# Altium PCB TM7705dayin.PcbDoc (part 1 of 2)
Units mm, origin at the board's own origin, x right, y up, seen from the top; angles counter-clockwise.
Board outline 80.01 x 33.4 mm, 2 copper layers (Top Layer, Bottom Layer); 118 components, 26 nets, 462 pads, 0 vias.
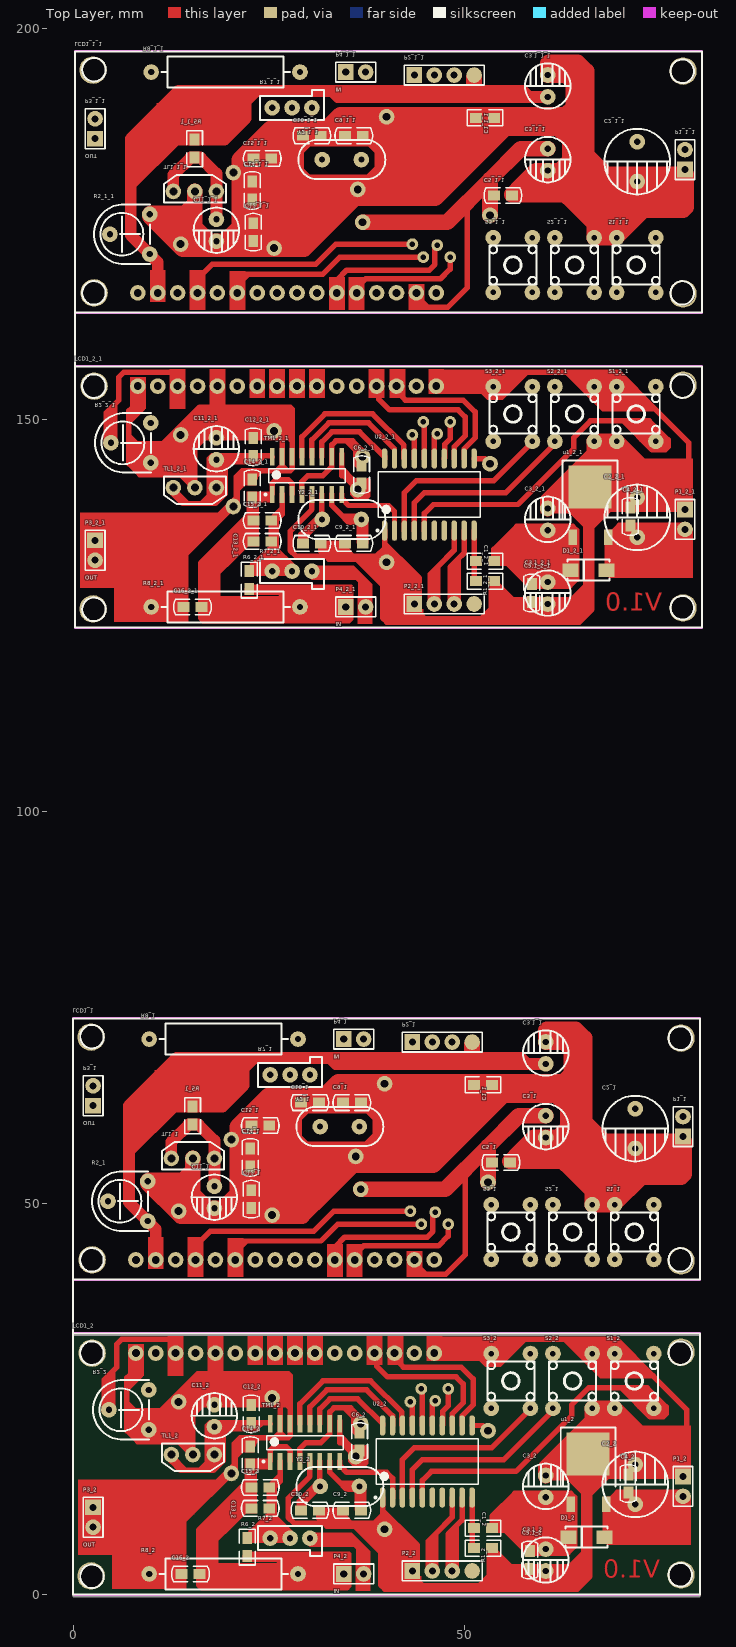
[diagram p0: Top Layer view]
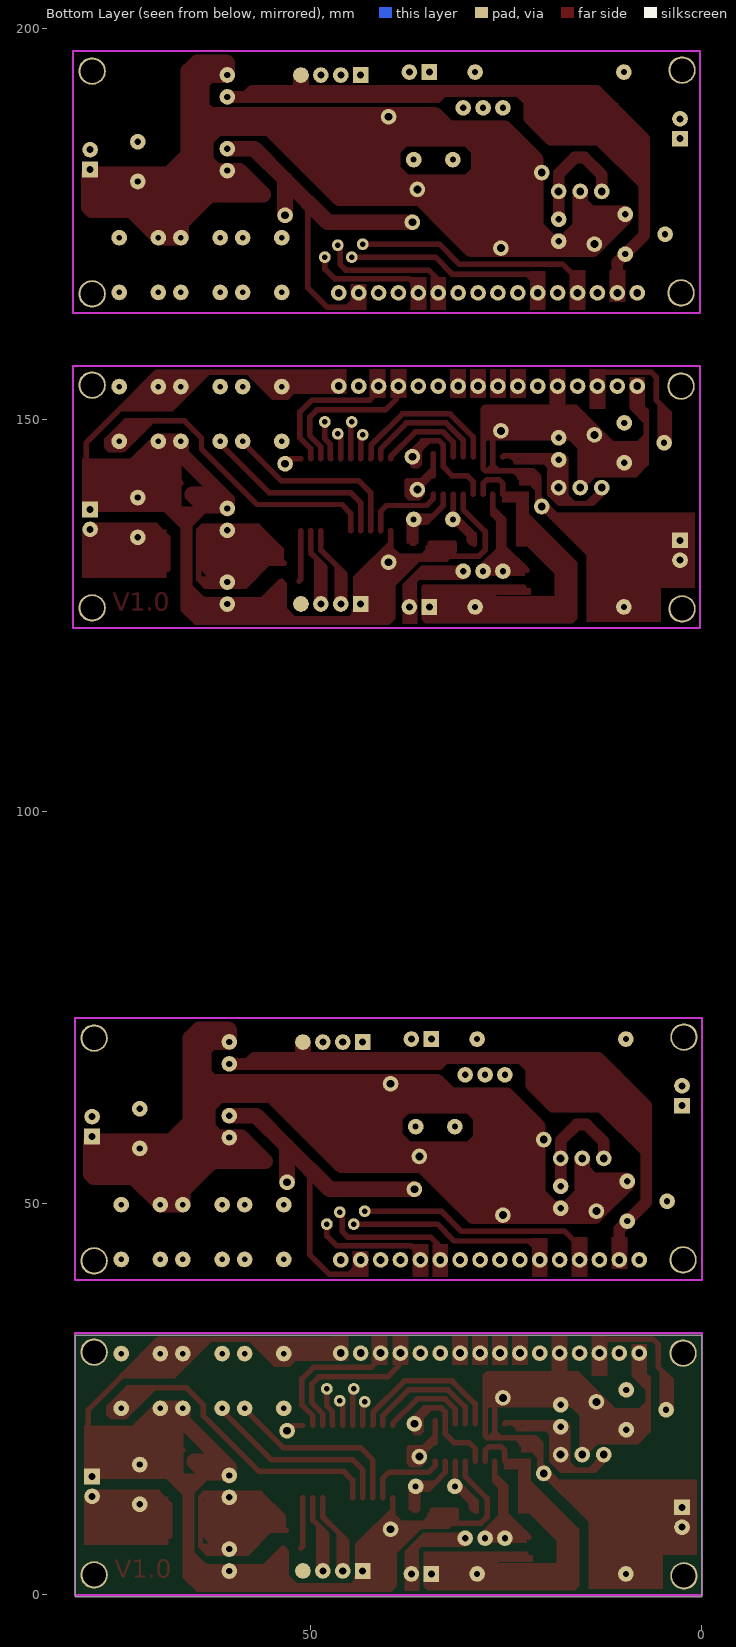
[diagram p1: Bottom Layer view, seen from below]

## Layer stack, top to bottom
Top Solder: solder mask 0.0102, Solder Resist, Dk 3.5
Top Layer: signal copper 0.0356
Dielectric 1: dielectric 0.32, FR-4, Dk 4.8
Bottom Layer: signal copper 0.0356
Bottom Solder: solder mask 0.0102, Solder Resist, Dk 3.5

## Board outline
0,-0.254 80.01,-0.254 80.01,33.147 0,33.147

## Design rules (kind name [scope] priority, off if disabled: settings)
Clearance [All] p1: gap=0.254
PolygonConnect [All] p1: connectstyle=Relief reliefconductorwidth=0.254 reliefentries=4 polygonreliefangle="90 Angle" airgapwidth=0.254
RoutingVias [All] p1: holewidth=0.711 width=1.27 viastyle="Through Hole" minholewidth=0.711 minwidth=1.27 maxholewidth=0.711 maxwidth=1.27
SolderMaskExpansion [All] p1: expansion=0.102
Width [All] p1: maxlimit=3 minlimit=0.4 preferedwidth=0.5 toplayer_minwidth=0.5 minimp=50.000000 maximp=50.000000 favimp=50.000000
30 further rules are at their usual default settings.

## Classes and differential pairs
component class TM7705: TL1

## Components (designator, comment, footprint, x,y, rotation, side; value= is the part's Value field where it differs from the comment)
C1_1 "10uF" 0805 51.181,65.111 r0 top (schematic designator C1)
C1_1_1 "10uF" 0805 51.435,188.555 r0 top (schematic designator C1)
C1_2 "10uF" 0805 51.181,8.509 r0 top (schematic designator C1)
C1_2_1 "10uF" 0805 51.435,131.953 r0 top (schematic designator C1)
C2_1 "100uF" DR3 71.755,62.063 r270 top (schematic designator C2)
C2_1_1 "100uF" DR3 72.009,185.507 r270 top (schematic designator C2)
C2_2 "100uF" DR3 71.755,11.557 r90 top (schematic designator C2)
C2_2_1 "100uF" DR3 72.009,135.001 r90 top (schematic designator C2)
C3.1_1 "100uF" DR 60.325,67.778 r90 top (schematic designator C3.1)
C3.1_1_1 "100uF" DR 60.579,191.222 r90 top (schematic designator C3.1)
C3.1_2 "100uF" DR 60.325,5.842 r270 top (schematic designator C3.1)
C3.1_2_1 "100uF" DR 60.579,129.286 r270 top (schematic designator C3.1)
C3_1 "100uF" DR 60.325,61.174 r270 top (schematic designator C3)
C3_1_1 "100uF" DR 60.579,184.618 r270 top (schematic designator C3)
C3_2 "100uF" DR 60.325,12.446 r90 top (schematic designator C3)
C3_2_1 "100uF" DR 60.579,135.89 r90 top (schematic designator C3)
C4_2 "104" 0805C 70.866,15.367 r270 top (schematic designator C4)
C4_2_1 "104" 0805C 71.12,138.811 r270 top (schematic designator C4)
C5.1_2 "104" 0805C 58.293,3.302 r90 top (schematic designator C5.1)
C5.1_2_1 "104" 0805C 58.547,126.746 r90 top (schematic designator C5.1)
C5_1 "104" 0805C 55.753,55.205 r180 top (schematic designator C5)
C5_1_1 "104" 0805C 56.007,178.649 r180 top (schematic designator C5)
C6_2 "226" 0805C 36.576,18.415 r90 top (schematic designator C6)
C6_2_1 "226" 0805C 36.83,141.859 r90 top (schematic designator C6)
C9_1 "30p" 0805C 36.717,62.825 r180 top (schematic designator C9)
C9_1_1 "30p" 0805C 36.971,186.269 r180 top (schematic designator C9)
C9_2 "30p" 0805C 36.717,10.795 r180 top (schematic designator C9)
C9_2_1 "30p" 0805C 36.971,134.239 r180 top (schematic designator C9)
C10_1 "30p" 0805C 29.069,62.825 r0 top (schematic designator C10)
C10_1_1 "30p" 0805C 29.323,186.269 r0 top (schematic designator C10)
C10_2 "30p" 0805C 29.069,10.795 r0 top (schematic designator C10)
C10_2_1 "30p" 0805C 29.323,134.239 r0 top (schematic designator C10)
C11_1 "47U" DR 18.034,52.157 r270 top (schematic designator C11)
C11_1_1 "47U" DR 18.288,175.601 r270 top (schematic designator C11)
C11_2 "47U" DR 18.034,21.463 r90 top (schematic designator C11)
C11_2_1 "47U" DR 18.288,144.907 r90 top (schematic designator C11)
C12_1 "104" 0805C 22.733,49.363 r90 top (schematic designator C12)
C12_1_1 "104" 0805C 22.987,172.807 r90 top (schematic designator C12)
C12_2 "104" 0805C 22.733,24.257 r270 top (schematic designator C12)
C12_2_1 "104" 0805C 22.987,147.701 r270 top (schematic designator C12)
C13_2 "226" 0805C 25.033,11.049 r180 top (schematic designator C13)
C13_2_1 "226" 0805C 25.287,134.493 r180 top (schematic designator C13)
C14_1 "103" 0805C 22.606,54.697 r90 top (schematic designator C14)
C14_1_1 "103" 0805C 22.86,178.141 r90 top (schematic designator C14)
C14_2 "103" 0805C 22.606,18.923 r270 top (schematic designator C14)
C14_2_1 "103" 0805C 22.86,142.367 r270 top (schematic designator C14)
C15_1 "103" 0805C 25.033,59.904 r180 top (schematic designator C15)
C15_1_1 "103" 0805C 25.287,183.348 r180 top (schematic designator C15)
C15_2 "103" 0805C 25.033,13.716 r180 top (schematic designator C15)
C15_2_1 "103" 0805C 25.287,137.16 r180 top (schematic designator C15)
C16_2 "226" 0805C 13.829,2.667 r0 top (schematic designator C16)
C16_2_1 "226" 0805C 14.083,126.111 r0 top (schematic designator C16)
D1_2 "Diode" DO-214AC 65.532,7.366 r180 top (schematic designator D1)
D1_2_1 "Diode" DO-214AC 65.786,130.81 r180 top (schematic designator D1)
LCD1_1 "LCD1602" LCD1602 8.001,42.759 r0 top (schematic designator LCD1)
LCD1_1_1 "LCD1602" LCD1602 8.255,166.203 r0 top (schematic designator LCD1)
LCD1_2 "LCD1602" LCD1602 8.001,30.861 r0 top (schematic designator LCD1)
LCD1_2_1 "LCD1602" LCD1602 8.255,154.305 r0 top (schematic designator LCD1)
P1_1 "Header 2" HDR1X2 77.851,58.507 r90 top (schematic designator P1)
P1_1_1 "Header 2" HDR1X2 78.105,181.951 r90 top (schematic designator P1)
P1_2 "Header 2" HDR1X2 77.851,15.113 r270 top (schematic designator P1)
P1_2_1 "Header 2" HDR1X2 78.105,138.557 r270 top (schematic designator P1)
P2_1 "comm" HDR1X4 43.307,70.572 r0 top (schematic designator P2)
P2_1_1 "comm" HDR1X4 43.561,194.016 r0 top (schematic designator P2)
P2_2 "comm" HDR1X4 43.307,3.048 r0 top (schematic designator P2)
P2_2_1 "comm" HDR1X4 43.561,126.492 r0 top (schematic designator P2)
P3_1 "OUT" HDR1X2 2.54,62.444 r90 top (schematic designator P3)
P3_1_1 "OUT" HDR1X2 2.794,185.888 r90 top (schematic designator P3)
P3_2 "OUT" HDR1X2 2.54,11.176 r270 top (schematic designator P3)
P3_2_1 "OUT" HDR1X2 2.794,134.62 r270 top (schematic designator P3)
P4_1 "IN" HDR1X2 34.544,70.953 r0 top (schematic designator P4)
P4_1_1 "IN" HDR1X2 34.798,194.397 r0 top (schematic designator P4)
P4_2 "IN" HDR1X2 34.544,2.667 r0 top (schematic designator P4)
P4_2_1 "IN" HDR1X2 34.798,126.111 r0 top (schematic designator P4)
R1_2 "10K" 0805R 53.467,5.969 r180 top (schematic designator R1)
R1_2_1 "10K" 0805R 53.721,129.413 r180 top (schematic designator R1)
R2_1 "10k" DWQ#1 9.525,47.712 r180 top (schematic designator R2)
R2_1_1 "10k" DWQ#1 9.779,171.156 r180 top (schematic designator R2)
R2_2 "10k" DWQ#2 9.652,26.162 r180 top (schematic designator R2)
R2_2_1 "10k" DWQ#2 9.906,149.606 r180 top (schematic designator R2)
R5_1 "1K" 0805R 15.24,60.031 r90 top (schematic designator R5)
R5_1_1 "1K" 0805R 15.494,183.475 r90 top (schematic designator R5)
R6_2 "5K" 0805R 22.225,4.953 r90 top (schematic designator R6)
R6_2_1 "5K" 0805R 22.479,128.397 r90 top (schematic designator R6)
R7_1 "100k" DWQ1 30.226,66.381 r180 top (schematic designator R7)
R7_1_1 "100k" DWQ1 30.48,189.825 r180 top (schematic designator R7)
R7_2 "100k" DWQ1 30.226,7.239 r180 top (schematic designator R7)
R7_2_1 "100k" DWQ1 30.48,130.683 r180 top (schematic designator R7)
R8_1 "0.01" DZ-1W 28.702,70.953 r180 top (schematic designator R8)
R8_1_1 "0.01" DZ-1W 28.956,194.397 r180 top (schematic designator R8)
R8_2 "0.01" DZ-1W 28.702,2.667 r180 top (schematic designator R8)
R8_2_1 "0.01" DZ-1W 28.956,126.111 r180 top (schematic designator R8)
S1_1 "SW-PB" SW 71.628,46.315 r0 top (schematic designator S1)
S1_1_1 "SW-PB" SW 71.882,169.759 r0 top (schematic designator S1)
S1_2 "SW-PB" SW 71.628,27.305 r0 top (schematic designator S1)
S1_2_1 "SW-PB" SW 71.882,150.749 r0 top (schematic designator S1)
S2_1 "SW-PB" SW 63.754,46.315 r180 top (schematic designator S2)
S2_1_1 "SW-PB" SW 64.008,169.759 r180 top (schematic designator S2)
S2_2 "SW-PB" SW 63.754,27.305 r180 top (schematic designator S2)
S2_2_1 "SW-PB" SW 64.008,150.749 r180 top (schematic designator S2)
S3_1 "SW-PB" SW 55.88,46.315 r0 top (schematic designator S3)
S3_1_1 "SW-PB" SW 56.134,169.759 r0 top (schematic designator S3)
S3_2 "SW-PB" SW 55.88,27.305 r0 top (schematic designator S3)
S3_2_1 "SW-PB" SW 56.134,150.749 r0 top (schematic designator S3)
TL1_1 "TL431" TL431 18.034,55.713 r180 top (schematic designator TL1)
TL1_1_1 "TL431" TL431 18.288,179.157 r180 top (schematic designator TL1)
TL1_2 "TL431" TL431 18.034,17.907 r180 top (schematic designator TL1)
TL1_2_1 "TL431" TL431 18.288,141.351 r180 top (schematic designator TL1)
TM1_2 "TM7705" SOIC-16 29.591,19.431 r90 top (schematic designator TM1)
TM1_2_1 "TM7705" SOIC-16 29.845,142.875 r90 top (schematic designator TM1)
u1_2 "7805" DPAK 63.545,11.557 r0 top (schematic designator u1)
u1_2_1 "7805" DPAK 63.799,135.001 r0 top (schematic designator u1)
U2_2 "STC12C2052" SOIC-20 45.212,17.018 r90 top (schematic designator U2)
U2_2_1 "STC12C2052" SOIC-20 45.466,140.462 r90 top (schematic designator U2)
Y2_1 "4.9152M" JZ 34.036,59.777 r0 top (schematic designator Y2)
Y2_1_1 "4.9152M" JZ 34.29,183.221 r0 top (schematic designator Y2)
Y2_2 "4.9152M" JZ 34.036,13.843 r0 top (schematic designator Y2)
Y2_2_1 "4.9152M" JZ 34.29,137.287 r0 top (schematic designator Y2)

## Footprints (in the part's own frame and the unit in brackets; to place one, negate y for a bottom-side part, rotate by r counter-clockwise, add the part's x,y. Pads: shape width x height; smd on the part's side, far side on the other; paste and mask are expansions set on the pad)
0805 [mil]
  rect 60x50 smd: 1(0,0) 2(90,0)
  silkscreen extent -45,-40 135,40
0805C [mil]
  rect 60x50 smd: 1(0,0) 2(90,0)
  silkscreen extent -49,-39 140,39
0805R [mil]
  rect 60x50 smd: 1(0,0) 2(90,0)
  silkscreen extent -45,-40 135,40
DO-214AC [mm]
  rect 2x1.75 smd: 1(-2.3,0) 2(2.3,0)
  silkscreen extent -2.7,-1.35 2.7,1.35, body extent -2.74,-1.52 2.74,1.27, height 2.3
DPAK [mm]
  rect 1.1x2 smd: 1(0,0) 3(4.5,0)
  rect 5.5x5.5 smd: 2(2.2,6.4)
  silkscreen extent -1.3,2.3 5.7,9.8
DR [mm]
  round 2 hole 0.8: 1(0,0) 2(2.8,0)
  silkscreen extent -1.5,-2.9 4.3,2.9
DR3 [mm]
  round 2 hole 0.8: 1(0,0) 2(5.08,0)
  silkscreen extent -1.65,-4.19 6.73,4.19
DWQ#1 [mm]
  round 2 hole 0.8: 1(0,0) 2(0,-5.08) 3(5.08,-2.54)
  silkscreen extent 0,-6.35 7.11,1.27
DWQ#2 [mm]
  round 2 hole 0.8: 1(0,0) 2(0,5.08) 3(5.08,2.54)
  silkscreen extent 0,-1.27 7.11,6.35
DWQ1 [mm]
  round 2 hole 0.8: 1(0,0) 2(5.08,0) 3(2.54,0)
  silkscreen extent -1.52,-2.29 6.6,1.52
DZ-1W [mm]
  round 2 hole 0.8: 1(0,0) 2(19,0)
  silkscreen extent 1.27,-2 17.7,2
HDR1X2 [mm] "Connector; Header; 2 Position"
  rect 2x2 hole 0.9: 1(0,0)
  round 2 hole 0.9: 2(2.54,0)
  silkscreen extent -1.27,-1.27 3.81,1.27
HDR1X4 [mm] "Connector; Header; 4 Position"
  rect 2x2 hole 0.9: 1(0,0)
  round 2 hole 0.9: 2(2.54,0) 3(5.08,0)
  round 2 all layers, no hole: 4(7.62,0)
  silkscreen extent -1.27,-1.27 8.89,1.27
JZ [mm]
  round 2 hole 0.762: 1(-2.5,0) 2(2.5,0)
  silkscreen extent -5.55,-2.5 5.56,2.5
LCD1602 [mm]
  round 2 hole 1: 1(0,0) 2(2.54,0) 3(5.08,0) 4(7.62,0) 5(10.16,0) 6(12.7,0) 7(15.24,0) 8(17.78,0) 9(20.32,0) 10(22.86,0) 11(25.4,0) 12(27.94,0) 13(30.48,0) 14(33.02,0) 15(35.56,0) 16(38.1,0)
  silkscreen extent -8,-2.5 72,30.8
SOIC-16 [mm]
  rect 2.2x0.6 smd: 1(-2.4,4.445) 2(-2.4,3.175) 3(-2.4,1.905) 4(-2.4,0.635) 5(-2.4,-0.635) 6(-2.4,-1.905) 7(-2.4,-3.175) 8(-2.4,-4.445) 9(2.4,-4.445) 10(2.4,-3.175) 11(2.4,-1.905) 12(2.4,-0.635) 13(2.4,0.635) 14(2.4,1.905) 15(2.4,3.175) 16(2.4,4.445)
  silkscreen extent -2.52,-4.9 0.9,5.42, body extent -3.1,-5 3,5, height 1.51
SOIC-20 [mm]
  oval 2.6x0.7 smd: 1(-4.6,5.715) 2(-4.6,4.445) 3(-4.6,3.175) 4(-4.6,1.905) 5(-4.6,0.635) 6(-4.6,-0.635) 7(-4.6,-1.905) 8(-4.6,-3.175) 9(-4.6,-4.445) 10(-4.6,-5.715) 11(4.6,-5.715) 12(4.6,-4.445) 13(4.6,-3.175) 14(4.6,-1.905) 15(4.6,-0.635) 16(4.6,0.635) 17(4.6,1.905) 18(4.6,3.175) 19(4.6,4.445) 20(4.6,5.715)
  silkscreen extent -4.72,-6.5 2.9,6.74, body extent -5.22,-6.47 5.33,6.53, height 2.56
SW [mm]
  round 2 hole 0.7: 1(-2.5,-3.5) 1(-2.5,3.5) 2(2.5,-3.5) 2(2.5,3.5)
  silkscreen extent -3,-2.5 3,2.5
TL431 [mm]
  round 2 hole 1: A(2.75,0) K(5.5,0) R(0,0)
  silkscreen extent -1.2,-2.1 6.7,1.4

## Part data
C1_1 C1_1_1 C1_2 C1_2_1 C2_1 C2_1_1 C2_2 C2_2_1 C3.1_1 C3.1_1_1 C3.1_2 C3.1_2_1 C3_1 C3_1_1 C3_2 C3_2_1 C11_1 C11_1_1 C11_2 C11_2_1: library part "Cap Pol1", "Polarized Capacitor (Radial)"
C4_2 C4_2_1 C5.1_2 C5.1_2_1 C5_1 C5_1_1 C6_2 C6_2_1 C9_1 C9_1_1 C9_2 C9_2_1 C10_1 C10_1_1 C10_2 C10_2_1 C12_1 C12_1_1 C12_2 C12_2_1 C13_2 C13_2_1 C14_1 C14_1_1 C14_2 C14_2_1 C15_1 C15_1_1 C15_2 C15_2_1 C16_2 C16_2_1: library part Cap, "Capacitor"
D1_2 D1_2_1: "Default Diode"
P1_1 P1_1_1 P1_2 P1_2_1: "Header, 2-Pin"
P2_1 P2_1_1 P2_2 P2_2_1: library part "Header 4", "Header, 4-Pin"
P3_1 P3_1_1 P3_2 P3_2_1 P4_1 P4_1_1 P4_2 P4_2_1: library part "Header 2", "Header, 2-Pin"
R1_2 R1_2_1 R5_1 R5_1_1 R6_2 R6_2_1 R8_1 R8_1_1 R8_2 R8_2_1: library part Res2, "Resistor"
R2_1 R2_1_1 R2_2 R2_2_1 R7_1 R7_1_1 R7_2 R7_2_1: library part RPot, "Potentiometer"
S1_1 S1_1_1 S1_2 S1_2_1 S2_1 S2_1_1 S2_2 S2_2_1 S3_1 S3_1_1 S3_2 S3_2_1: "Switch"
Y2_1 Y2_1_1 Y2_2 Y2_2_1: library part XTAL, "Crystal Oscillator"

## Free pads (board coordinates)
  round 3.5 hole 3: 2(2.413,30.861) 2(2.413,42.759) 2(2.667,154.305) 2(2.667,166.203) 3(77.597,30.988) 3(77.597,42.632) 3(77.851,154.432) 3(77.851,166.076) 4(77.597,2.54) 4(77.597,71.08) 4(77.851,125.984) 4(77.851,194.524) 5(2.286,2.413) 5(2.286,71.207) 5(2.54,125.857) 5(2.54,194.651)
  round 2 hole 1: 14(52.959,20.955) 14(52.959,52.665) 14(53.213,144.399) 14(53.213,176.109) 15(36.703,21.844) 15(36.703,51.776) 15(36.957,145.288) 15(36.957,175.22) 22(20.193,15.494) 22(20.193,58.126) 22(20.447,138.938) 22(20.447,181.57) 23(39.751,8.382) 23(39.751,65.238) 23(40.005,131.826) 23(40.005,188.682) 24(13.462,24.638) 24(13.462,48.982) 24(13.716,148.082) 24(13.716,172.426) 25(25.4,25.146) 25(25.4,48.474) 25(25.654,148.59) 25(25.654,171.918) 29(36.068,17.653) 29(36.068,55.967) 29(36.322,141.097) 29(36.322,179.411)
  round 1.5 hole 0.7: 17(47.879,26.289) 17(47.879,47.331) 17(48.133,149.733) 17(48.133,170.775) 18(46.228,24.765) 18(46.228,48.855) 18(46.482,148.209) 18(46.482,172.299) 20(44.45,26.289) 20(44.45,47.331) 20(44.704,149.733) 20(44.704,170.775) 21(43.053,24.638) 21(43.053,48.982) 21(43.307,148.082) 21(43.307,172.426)

## Nets (pads, with @x,y where several pads share a name; then routed paths per layer and width w, separated by ;. In a path a pad name is that pad's centre, name@x,y a point inside that pad or via, vN(x,y) a via of type N, cw(c..) or ccw(c..) an arc to the next point about the centre after c; other vN are vias at no path point)
+5VCC: 
DIN: 
DOUT: 
DRDY: 
GND: 
I: 
LOAD_V: 
NetC1_2: 
NetC9_2: 
NetC10_2: 
NetC11_1: 
NetLCD1_3: 
NetLCD1_4: 
NetLCD1_6: 
NetLCD1_11: 
NetLCD1_12: 
NetLCD1_13: 
NetLCD1_14: 
NetS1_2: 
NetS2_2: 
NetS3_2: 
POWER: 
RXD: 
SCLK: 
TXD: 
V: 
pads on no net: C1_1.1 C1_1.2 C1_1_1.1 C1_1_1.2 C1_2.1 C1_2.2 C1_2_1.1 C1_2_1.2 C2_1.1 C2_1.2 C2_1_1.1 C2_1_1.2 C2_2.1 C2_2.2 C2_2_1.1 C2_2_1.2 C3.1_1.1 C3.1_1.2 C3.1_1_1.1 C3.1_1_1.2 C3.1_2.1 C3.1_2.2 C3.1_2_1.1 C3.1_2_1.2 C3_1.1 C3_1.2 C3_1_1.1 C3_1_1.2 C3_2.1 C3_2.2 C3_2_1.1 C3_2_1.2 C4_2.1 C4_2.2 C4_2_1.1 C4_2_1.2 C5.1_2.1 C5.1_2.2 C5.1_2_1.1 C5.1_2_1.2 C5_1.1 C5_1.2 C5_1_1.1 C5_1_1.2 C6_2.1 C6_2.2 C6_2_1.1 C6_2_1.2 C9_1.1 C9_1.2 C9_1_1.1 C9_1_1.2 C9_2.1 C9_2.2 C9_2_1.1 C9_2_1.2 C10_1.1 C10_1.2 C10_1_1.1 C10_1_1.2 C10_2.1 C10_2.2 C10_2_1.1 C10_2_1.2 C11_1.1 C11_1.2 C11_1_1.1 C11_1_1.2 C11_2.1 C11_2.2 C11_2_1.1 C11_2_1.2 C12_1.1 C12_1.2 C12_1_1.1 C12_1_1.2 C12_2.1 C12_2.2 C12_2_1.1 C12_2_1.2 C13_2.1 C13_2.2 C13_2_1.1 C13_2_1.2 C14_1.1 C14_1.2 C14_1_1.1 C14_1_1.2 C14_2.1 C14_2.2 C14_2_1.1 C14_2_1.2 C15_1.1 C15_1.2 C15_1_1.1 C15_1_1.2 C15_2.1 C15_2.2 C15_2_1.1 C15_2_1.2 C16_2.1 C16_2.2 C16_2_1.1 C16_2_1.2 D1_2.1 D1_2.2 D1_2_1.1 D1_2_1.2 LCD1_1.1 LCD1_1.2 LCD1_1.3 LCD1_1.4 LCD1_1.5 LCD1_1.6 LCD1_1.7 LCD1_1.8 LCD1_1.9 LCD1_1.10 LCD1_1.11 LCD1_1.12 LCD1_1.13 LCD1_1.14 LCD1_1.15 LCD1_1.16 LCD1_1_1.1 LCD1_1_1.2 LCD1_1_1.3 LCD1_1_1.4 LCD1_1_1.5 LCD1_1_1.6 LCD1_1_1.7 LCD1_1_1.8 LCD1_1_1.9 LCD1_1_1.10 LCD1_1_1.11 LCD1_1_1.12 LCD1_1_1.13 LCD1_1_1.14 LCD1_1_1.15 LCD1_1_1.16 LCD1_2.1 LCD1_2.2 LCD1_2.3 LCD1_2.4 LCD1_2.5 LCD1_2.6 LCD1_2.7 LCD1_2.8 LCD1_2.9 LCD1_2.10 LCD1_2.11 LCD1_2.12 LCD1_2.13 LCD1_2.14 LCD1_2.15 LCD1_2.16 LCD1_2_1.1 LCD1_2_1.2 LCD1_2_1.3 LCD1_2_1.4 LCD1_2_1.5 LCD1_2_1.6 LCD1_2_1.7 LCD1_2_1.8 LCD1_2_1.9 LCD1_2_1.10 LCD1_2_1.11 LCD1_2_1.12 LCD1_2_1.13 LCD1_2_1.14 LCD1_2_1.15 LCD1_2_1.16 P1_1.1 P1_1.2 P1_1_1.1 P1_1_1.2 P1_2.1 P1_2.2 P1_2_1.1 P1_2_1.2 P2_1.1 P2_1.2 P2_1.3 P2_1.4 P2_1_1.1 P2_1_1.2 P2_1_1.3 P2_1_1.4 P2_2.1 P2_2.2 P2_2.3 P2_2.4 P2_2_1.1 P2_2_1.2 P2_2_1.3 P2_2_1.4 P3_1.1 P3_1.2 P3_1_1.1 P3_1_1.2 P3_2.1 P3_2.2 P3_2_1.1 P3_2_1.2 P4_1.1 P4_1.2 P4_1_1.1 P4_1_1.2 P4_2.1 P4_2.2 P4_2_1.1 P4_2_1.2 R1_2.1 R1_2.2 R1_2_1.1 R1_2_1.2 R2_1.1 R2_1.2 R2_1.3 R2_1_1.1 R2_1_1.2 R2_1_1.3 R2_2.1 R2_2.2 R2_2.3 R2_2_1.1 R2_2_1.2 R2_2_1.3 R5_1.1 R5_1.2 R5_1_1.1 R5_1_1.2 R6_2.1 R6_2.2 R6_2_1.1 R6_2_1.2 R7_1.1 R7_1.2 R7_1.3 R7_1_1.1 R7_1_1.2 R7_1_1.3 R7_2.1 R7_2.2 R7_2.3 R7_2_1.1 R7_2_1.2 R7_2_1.3 R8_1.1 R8_1.2 R8_1_1.1 R8_1_1.2 R8_2.1 R8_2.2 R8_2_1.1 R8_2_1.2 S1_1.1 S1_1.2 S1_1_1.1 S1_1_1.2 S1_2.1 S1_2.2 S1_2_1.1 S1_2_1.2 S2_1.1 S2_1.2 S2_1_1.1 S2_1_1.2 S2_2.1 S2_2.2 S2_2_1.1 S2_2_1.2 S3_1.1 S3_1.2 S3_1_1.1 S3_1_1.2 S3_2.1 S3_2.2 S3_2_1.1 S3_2_1.2 TL1_1.A TL1_1.K TL1_1.R TL1_1_1.A TL1_1_1.K TL1_1_1.R TL1_2.A TL1_2.K TL1_2.R TL1_2_1.A TL1_2_1.K TL1_2_1.R TM1_2.1 TM1_2.2 TM1_2.3 TM1_2.4 TM1_2.5 TM1_2.6 TM1_2.7 TM1_2.8 TM1_2.9 TM1_2.10 TM1_2.11 TM1_2.12 TM1_2.13 TM1_2.14 TM1_2.15 TM1_2.16 TM1_2_1.1 TM1_2_1.2 TM1_2_1.3 TM1_2_1.4 TM1_2_1.5 TM1_2_1.6 TM1_2_1.7 TM1_2_1.8 TM1_2_1.9 TM1_2_1.10 TM1_2_1.11 TM1_2_1.12 TM1_2_1.13 TM1_2_1.14 TM1_2_1.15 TM1_2_1.16 u1_2.1 u1_2.2 u1_2.3 u1_2_1.1 u1_2_1.2 u1_2_1.3 U2_2.1 U2_2.2 U2_2.3 U2_2.4 U2_2.5 U2_2.6 U2_2.7 U2_2.8 U2_2.9 U2_2.10 U2_2.11 U2_2.12 U2_2.13 U2_2.14 U2_2.15 U2_2.16 U2_2.17 U2_2.18 U2_2.19 U2_2.20 U2_2_1.1 U2_2_1.2 U2_2_1.3 U2_2_1.4 U2_2_1.5 U2_2_1.6 U2_2_1.7 U2_2_1.8 U2_2_1.9 U2_2_1.10 U2_2_1.11 U2_2_1.12 U2_2_1.13 U2_2_1.14 U2_2_1.15 U2_2_1.16 U2_2_1.17 U2_2_1.18 U2_2_1.19 U2_2_1.20 Y2_1.1 Y2_1.2 Y2_1_1.1 Y2_1_1.2 Y2_2.1 Y2_2.2 Y2_2_1.1 Y2_2_1.2